# Altium PCB PCB_drv8424.pcbdoc
Units mm, origin at the board's own origin, x right, y up, seen from the top; angles counter-clockwise.
Board outline 67.56 x 55.39 mm, 2 copper layers (Top Layer, Bottom Layer); 14 components, 17 nets, 66 pads, 2 vias.
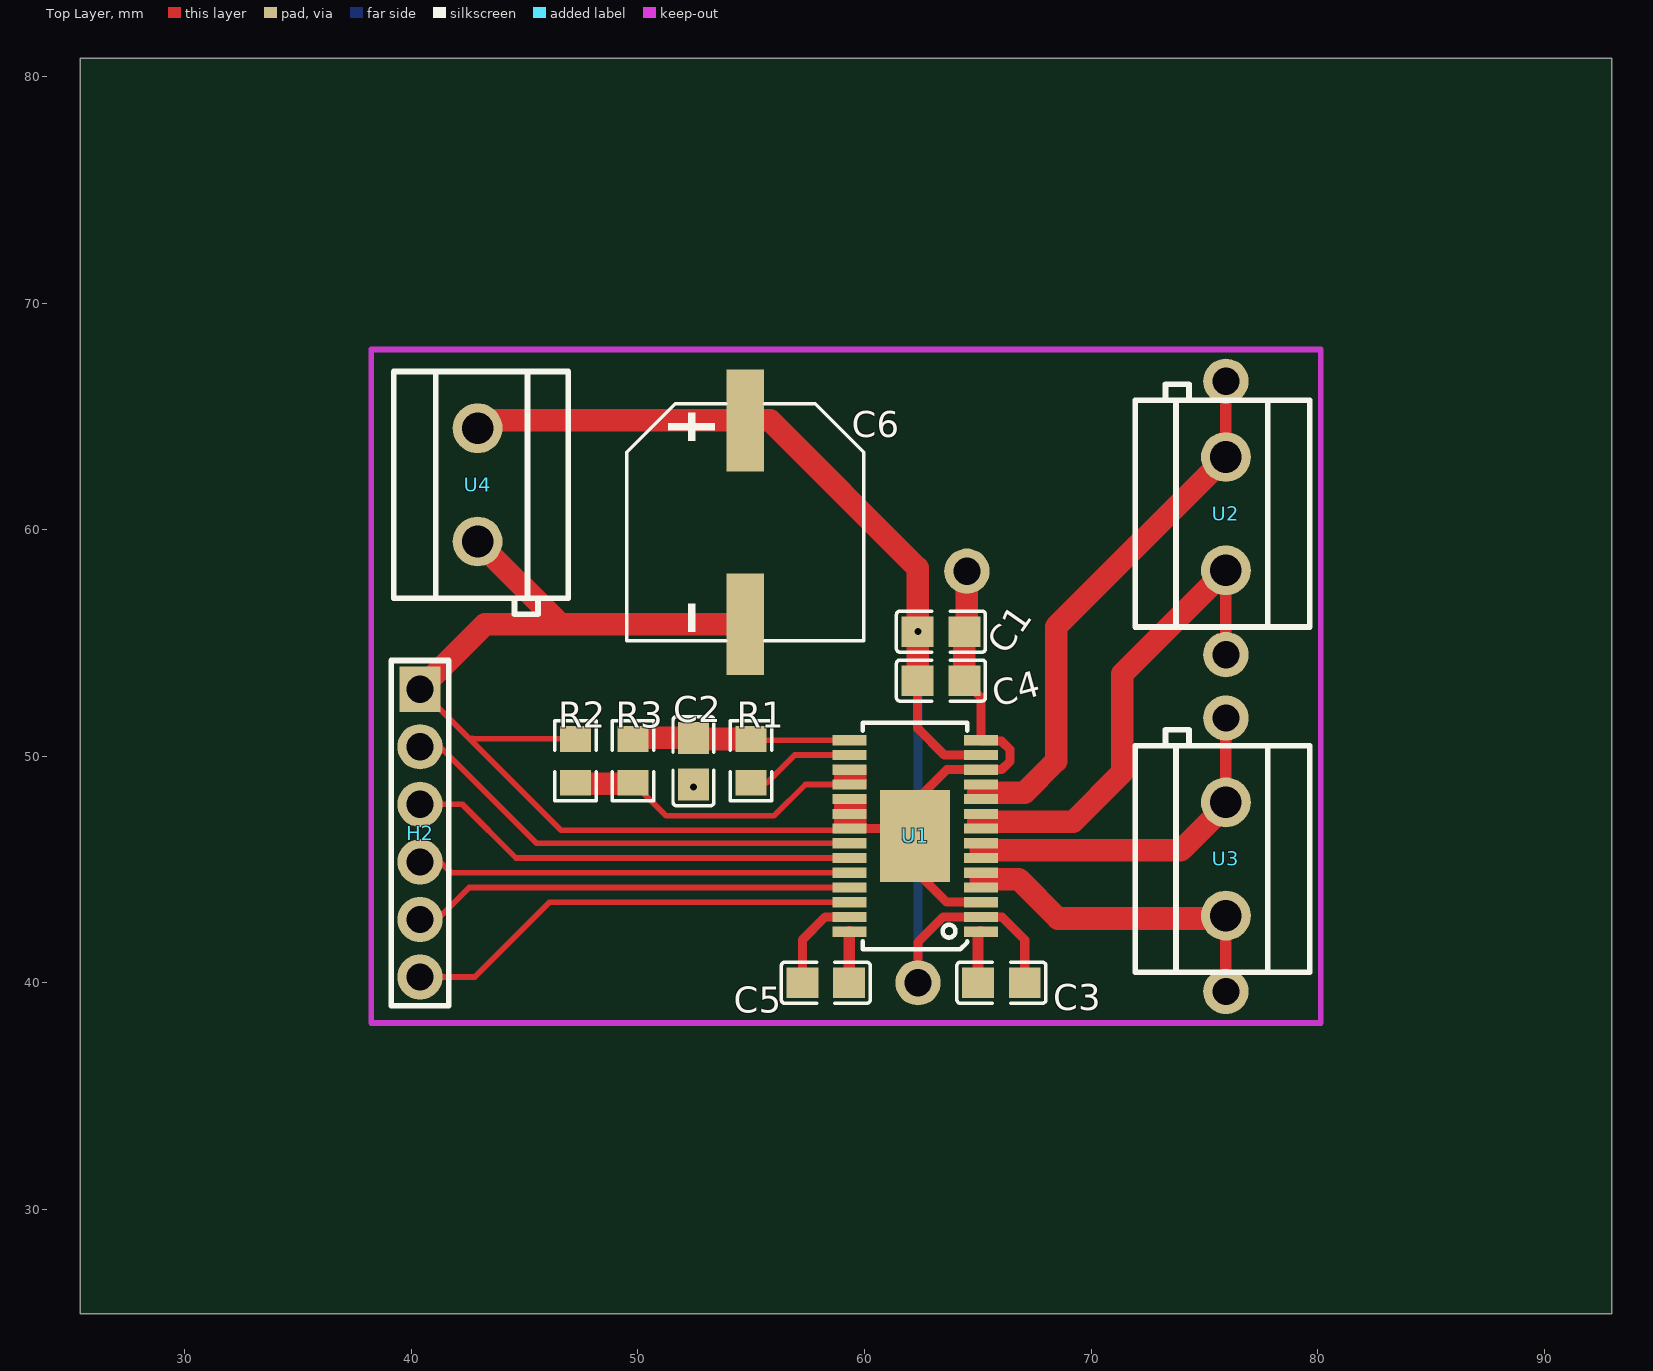
[diagram p0: Top Layer view]
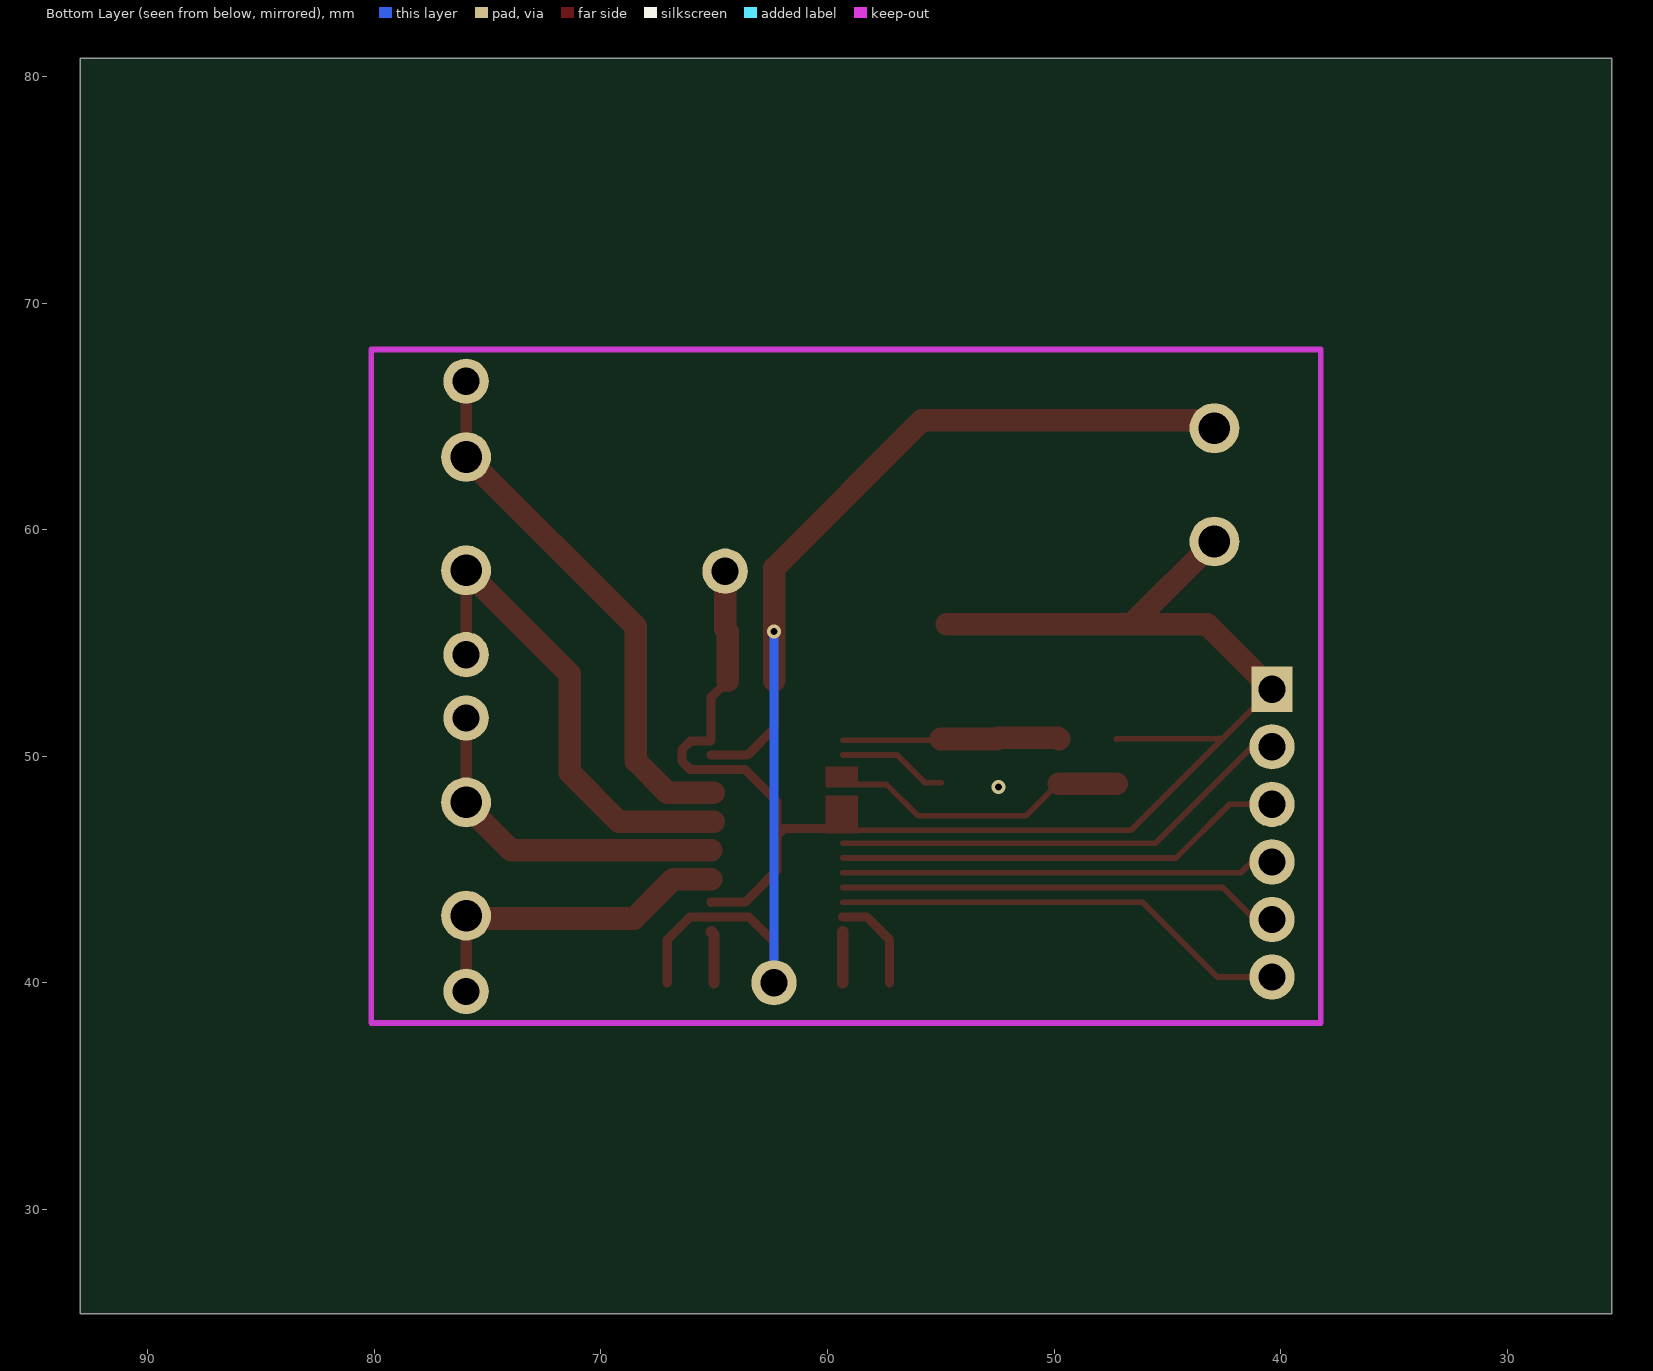
[diagram p1: Bottom Layer view, seen from below]

## Layer stack, top to bottom
Top Layer: signal copper (thickness not stored)
Dielectric: dielectric 0.32, FR-4, Dk 4.8
Bottom Layer: signal copper (thickness not stored)

## Board outline
92.964,25.4 25.4,25.4 25.4,80.792 92.964,80.792

## Components (designator, comment, footprint, x,y, rotation, side; value= is the part's Value field where it differs from the comment)
C1 "10nF" C0805 63.373,55.499 r0 top
C2 "470nF" C0805 52.451,49.784 r270 top
C3 "220nF" C0805 66.04,40.005 r180 top
C4 "10nF" C0805 63.373,53.34 r0 top
C5 "22nF" C0805 58.293,40.005 r180 top
C6 "100uF" CAP-SMD_BD10.0-L10.3-W10.3-FD 54.737,60.325 r270 top
H2 "CONN_FEMALE-2.54_1x6" HDR-TH_1X6P-P2.54 40.386,46.609 r270 top
R1 "10kΩ" R0805 54.991,49.798 r90 top
R2 "4.7Ω" R0805 47.244,49.798 r270 top
R3 "3Ω" R0805 49.784,49.798 r270 top
U1 "DRV8424PPWPR" TSSOP_28_POWERPAD 62.23,46.482 r180 top
U2 "KF301-5.0-2P" CONN-TH_P5.00_KF301-5.0-2P 75.946,60.706 r90 top
U3 "KF301-5.0-2P" CONN-TH_P5.00_KF301-5.0-2P 75.946,45.466 r90 top
U4 "KF301-5.0-2P" CONN-TH_P5.00_KF301-5.0-2P 42.926,61.976 r270 top

## Footprints (in the part's own frame and the unit in brackets; to place one, negate y for a bottom-side part, rotate by r counter-clockwise, add the part's x,y. Pads: shape width x height; smd on the part's side, far side on the other; paste and mask are expansions set on the pad)
C0805 [mm]
  rect 1.41x1.35 smd: 1(-1.03,0) 2(1.03,0)
  silkscreen extent -1.96,-0.9 1.96,0.9
CAP-SMD_BD10.0-L10.3-W10.3-FD [mm]
  rect 4.5x1.65 smd: 1(-4.5,0) 2(4.5,0)
  silkscreen extent -5.23,-5.23 5.23,5.23
CONN-TH_P5.00_KF301-5.0-2P [mm]
  round 2.2 hole 1.4: 1(-2.5,0) 2(2.5,0)
  silkscreen extent -5,-3.7 5.71,4
HDR-TH_1X6P-P2.54 [mm]
  rect 2x1.8 hole 1.2: 1(-6.35,0)
  round 2 hole 1.2: 2(-3.81,0) 3(-1.27,0) 4(1.27,0) 5(3.81,0) 6(6.35,0)
  silkscreen extent -7.62,-1.27 7.62,1.27
R0805 [mm]
  rect 1.133x1.377 smd: 1(-0.966,0) 2(0.966,0)
  silkscreen extent -1.76,-0.92 1.76,0.92
TSSOP_28_POWERPAD [mm]
  rect 1.5x0.45 smd: 1(-2.9,4.225) 2(-2.9,3.575) 3(-2.9,2.925) 4(-2.9,2.275) 5(-2.9,1.625) 6(-2.9,0.975) 6(-2.9,0.975) 7(-2.9,0.325) 8(-2.9,-0.325) 9(-2.9,-0.975) 10(-2.9,-1.625) 11(-2.9,-2.275) 12(-2.9,-2.925) 13(-2.9,-3.575) 14(-2.9,-4.225) 15(2.9,-4.225) 16(2.9,-3.575) 17(2.9,-2.925) 18(2.9,-2.275) 19(2.9,-1.625) 20(2.9,-0.975) 21(2.9,-0.325) 22(2.9,0.325) 23(2.9,0.975) 24(2.9,1.625) 25(2.9,2.275) 26(2.9,2.925) 27(2.9,3.575) 28(2.9,4.225)
  rect 3.1x4.05 smd: 29(0,0)
  silkscreen extent -2.3,-5 2.3,5

## Free pads (board coordinates)
  round 2 hole 1.2: 1(62.357,40.005) 1(64.516,58.166) 1(75.946,39.624) 1(75.946,51.689) 1(75.946,54.483) 1(75.946,66.548)

## Via types
v1: diameter 0.61, hole 0.305, Top Layer to Bottom Layer, tented both sides, 2 vias

## Nets (pads, with @x,y where several pads share a name; then routed paths per layer and width w, separated by ;. In a path a pad name is that pad's centre, name@x,y a point inside that pad or via, vN(x,y) a via of type N, cw(c..) or ccw(c..) an arc to the next point about the centre after c; other vN are vias at no path point)
AOUT1: pad.1@75.946,39.624 U1.4 U1.5 U3.1 | length 14.9
  Top Layer w0.5: pad.1@75.946,39.624 U3.1
  Top Layer w1: 65.131,44.577 66.802,44.577 68.54,42.839 U3.1@75.946,42.839
AOUT2: pad.1@75.946,51.689 U1.6 U1.7 U3.2 | length 15.4
  Top Layer w0.5: U3.2 pad.1@75.946,51.689
  Top Layer w1: 65.13,45.847 73.954,45.847 U3.2@75.946,47.839
BOUT1: pad.1@75.946,66.548 U1.10 U1.11 U2.2 | length 23.9
  Top Layer w0.5: U2.2 pad.1@75.946,66.548
  Top Layer w1: 65.024,48.387 67.056,48.387 68.453,49.784 68.453,55.712 U2.2
BOUT2: pad.1@75.946,54.483 U1.8 U1.9 U2.1 | length 21.8
  Top Layer w0.5: pad.1@75.946,54.483 U2.1
  Top Layer w1: 65.024,47.117 69.215,47.117 71.374,49.276 71.374,53.635 U2.1
DVDD: C2.1 R1.2 R3.1 U1.15 | length 9.7
  Top Layer w0.254: R1.2 R1.2@55.202,50.975 ; R1.2@55.202,50.706 U1.15
  Top Layer w1: R3.1 49.834,50.814 52.451,50.814 52.501,50.764 R1.2
GND: C1.2 C2.2 C4.2 C6.2 H2.1 pad.1@64.516,58.166 R2.1 U1.3 U1.12 U1.14 U1.19 U1.20 U1.21 U1.29 U4.2 | length 71.1
  Top Layer w0.254: H2.1 46.609,46.736 59.258,46.736 U1.21 ; 42.686,50.786 R2.1
  Top Layer w0.4: U1.21 61.905,46.807 U1.29 ; C4.2 65.131,52.614 U1.14 65.164,50.673 66.04,50.673 66.421,50.292 66.421,49.784 66.045,49.408 U1.12 63.632,49.408 62.23,48.006 U1.29 ; U1.3 63.627,43.561 62.23,44.958 U1.29
  Top Layer w1: H2.1 43.251,55.824 46.576,55.824 ; U4.2 46.577,55.825 C6.2 ; C4.2 C1.2 64.516,55.612 pad.1@64.516,58.166
  other v1: 52.451,48.641
PWMA1: H2.5 U1.25 | length 19.5
  Top Layer w0.254: H2.5 41.148,42.799 42.555,44.206 U1.25
PWMA2: H2.4 U1.24 | length 19.1
  Top Layer w0.254: H2.4 41.275,45.339 41.758,44.856 U1.24
PWMB1: H2.3 U1.23 | length 19.9
  Top Layer w0.254: H2.3 42.245,47.879 44.618,45.507 U1.23
PWMB2: H2.2 U1.22 | length 20.7
  Top Layer w0.254: H2.2 41.26,50.419 45.522,46.157 U1.22
SLEEP: H2.6 U1.26 | length 20.3
  Top Layer w0.254: H2.6 42.799,40.259 46.096,43.556 U1.26
U1_1: C3.2 U1.1 | length 2.3
  Top Layer w0.5: C3.2 65.009,42.136 U1.1
U1_16: R1.1 U1.16 | length 4.8
  Top Layer w0.254: R1.1 55.689,48.831 56.916,50.056 U1.16
U1_18: R2.2 R3.2 U1.17 U1.18 | length 13.3
  Top Layer w0.254: R3.2 51.244,47.371 56.007,47.371 57.394,48.758 U1.18
  Top Layer w1: R2.2@47.244,48.782 R3.2@49.784,48.782
U1_27: C5.2 U1.27 | length 4.4
  Top Layer w0.4: C5.2 57.262,41.895 58.275,42.908 U1.27
U1_28: C5.1 U1.28 | length 2.3
  Top Layer w0.5: C5.1 59.324,42.25 U1.28
VCC: C1.1 C3.1 C4.1 C6.1 pad.1@62.357,40.005 U1.2 U1.13 U4.1 | length 57.4
  Top Layer w0.4: C4.1 62.342,51.234 63.52,50.056 U1.13 ; pad.1@62.357,40.005 62.357,41.783 63.48,42.908 U1.2 66.058,42.908 67.071,41.895 C3.1
  Top Layer w1: U4.1 43.275,64.825 C6.1 55.825,64.825 62.343,58.307 C1.1 C4.1
  Bottom Layer w0.4: pad.1@62.357,40.005 v1(62.357,55.499)

## Polygon pours and split planes (outlines as drawn)
GND on Bottom Layer (solid): 80.137,67.945 80.137,38.227 38.227,38.227 38.227,67.945 80.137,67.945

## Other copper
Top Layer:
  region net GND: 58.674,46.609 58.674,47.371 58.674,48.26 60.071,48.26 60.071,46.609
  region net U1_18: 58.674,48.641 58.674,49.53 60.071,49.53 60.071,48.641